# EAGLE board PrismPanel (EAGLE 9.6.0)
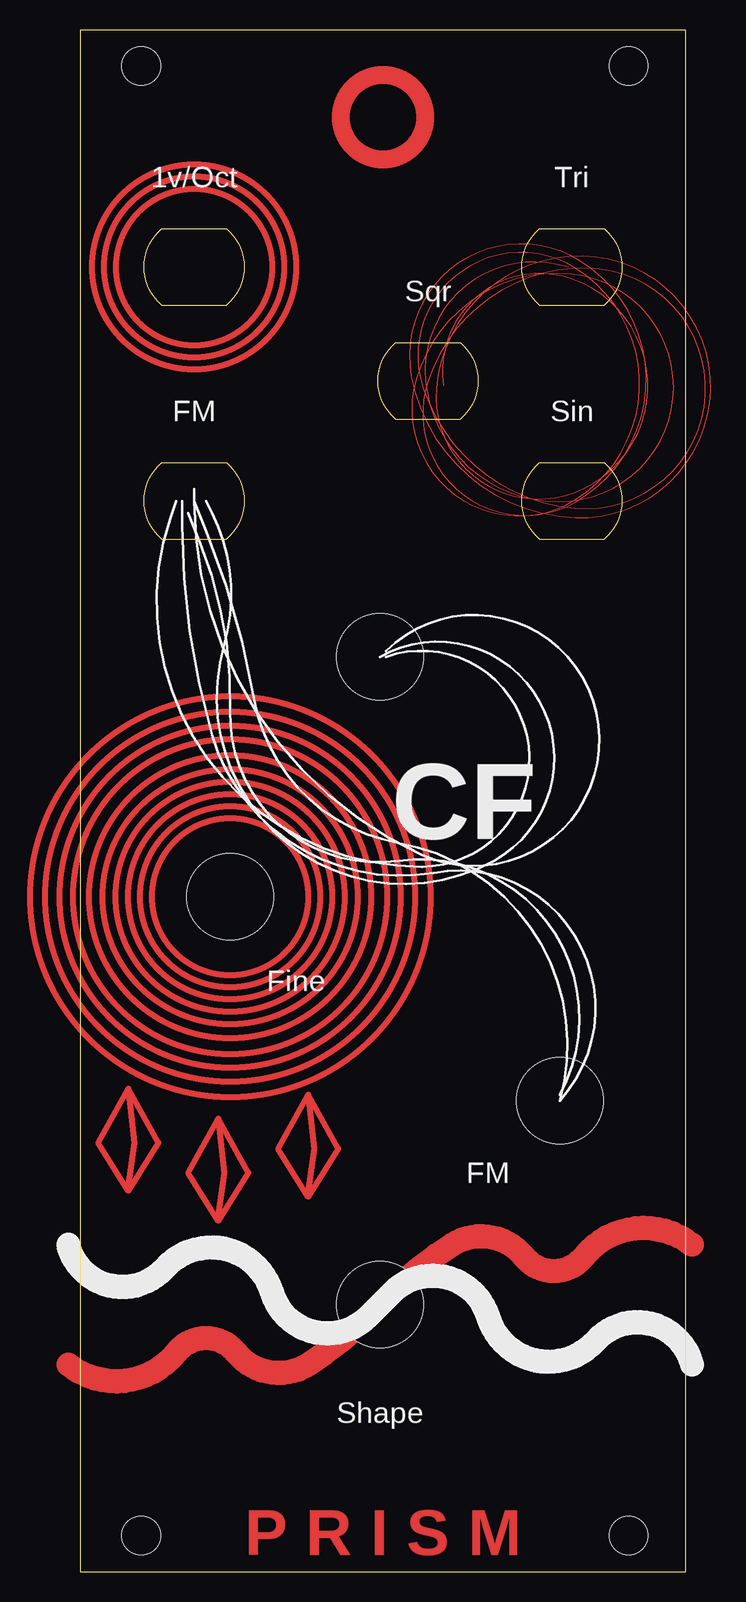
[diagram p0: board, top side]
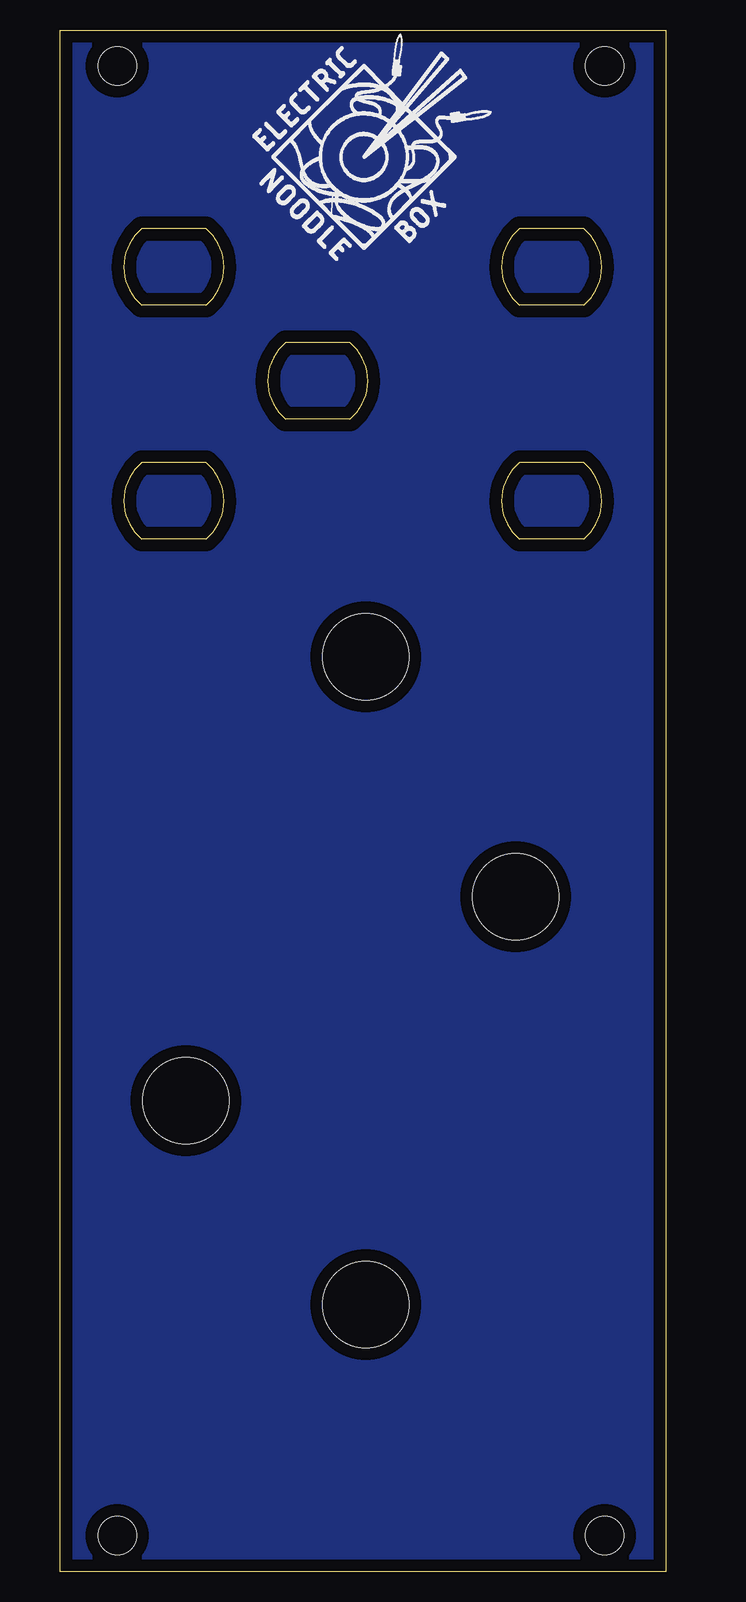
[diagram p1: board, bottom side, seen from below]

Size 50.5 x 128.5 mm. Coordinates in mm from the lower left corner, seen from the top.
Outline: 0,0 50.5,0 50.5,128.5 0,128.5 0,0
Copper layers (1*16): Top 0.035mm / dielectric 1.5mm / Bottom 0.035mm
Design rules "default": minimum track width 6mil, minimum drill 0.35mm, track to track 6mil, track to pad 6mil, pad to pad 6mil, via to via 6mil, smd to smd 6mil, copper to edge 40mil, drill to drill 6mil, minimum pad ring 10mil, minimum via ring 8mil, stop-mask expansion 4mil, vias tented up to drill 0mil, thermal gap 10mil
Holes 3.2 mm at 5.08,3 45.72,3 5.08,125.5 45.72,125.5

## Footprints (pad centres in the part's own frame; a part is rotated, then mirrored left to right if it is on the bottom)
ALPHA9MM_POT_CUTOUT = hole 7.2: 0,0

## Placement (x,y rotation side)
E$1  [CINCH_BANANA_CUTOUT]  9.5,108.75 90 top
E$2  [CINCH_BANANA_CUTOUT]  41,108.75 90 top
E$3  [CINCH_BANANA_CUTOUT]  9.5,89.25 90 top
E$4  [CINCH_BANANA_CUTOUT]  29,99.25 90 top
E$5  [CINCH_BANANA_CUTOUT]  41,89.25 90 top
E$6  [ALPHA9MM_POT_CUTOUT]  25,76.25 0 top
E$7  [ALPHA9MM_POT_CUTOUT]  12.5,56.25 0 top
E$8  [ALPHA9MM_POT_CUTOUT]  40,39.25 0 top
E$9  [ALPHA9MM_POT_CUTOUT]  25,22.25 0 top
E$10  [LOGO20X20]  34.5,108.75 0 bottom

## Library data of the parts
E$1-E$10 = ElectricNoodleBox

## Tracks (layer width: path | path; a pad name or v marks a point on that pad's centre or on a via)
GND
  pour Bottom: 0,0 50.5,0 50.5,128.5 0,128.5
S$1
  Top 2: 25,22.25 26,23.25 arc-13 31,27.25 arc-84 37,26.25 arc102 42,26.25 arc-90 51,27.25
S$2
  Top 2: 25,22.25 24,21.25 arc-13 19,17.25 arc-84 13,18.25 arc102 8,18.25 arc-90 -1,17.25
S$3
  Top 0.1: 40.7,108.75 39.8,108.95 arc108 28.8,99.25 arc90 40.9,89.25 arc169 40.9,108.15 arc80 28,99.35 arc138 41.3,89.35 arc116 41.3,108.65 arc140 28.6,98.65 arc66 41.2,88.65 arc184 42.3,108.65 arc72 29,99.25 arc138 41.3,89.15 arc118 41.7,109.25 arc133 27.6,99.65 arc77 41.3,87.85 arc181 41.9,109.65 arc86 29.7,98.65 arc115 41.2,89.95 arc140 41,107.75 arc118 30.3,98.85
S$4
  Top 0.5: 11.5,37.75 14,33.25 11.5,29.25 9,33.25 11.5,37.75 | 11.5,37.75 12,33.25 11.5,29.75
S$5
  Top 0.5: 4,40.25 6.5,35.75 4,31.75 1.5,35.75 4,40.25 | 4,40.25 4.5,35.75 4,32.25
S$6
  Top 0.5: 19,39.75 21.5,35.25 19,31.25 16.5,35.25 19,39.75 | 19,39.75 19.5,35.25 19,31.75
(copper drawn outside any net)
  shapes: Top circle x14

## Text on the board
Top: P R I S M
tPlace: 1v/Oct | Tri | Sqr | FM | Sin | CF | Fine | FM | Shape
tStop: T E N S I O N S | F L U X E S | O R B I T S | P R I S M